# Altium PCB 100-678-02-00 CIB.PcbDoc
Units mil, origin at the board's own origin, x right, y up, seen from the top; angles counter-clockwise.
Board outline 4640 x 6850 mil, 2 copper layers (Top Layer, Bottom Layer), stack 92.4 mil thick; 41 components, 41 nets, 209 pads, 1 vias.
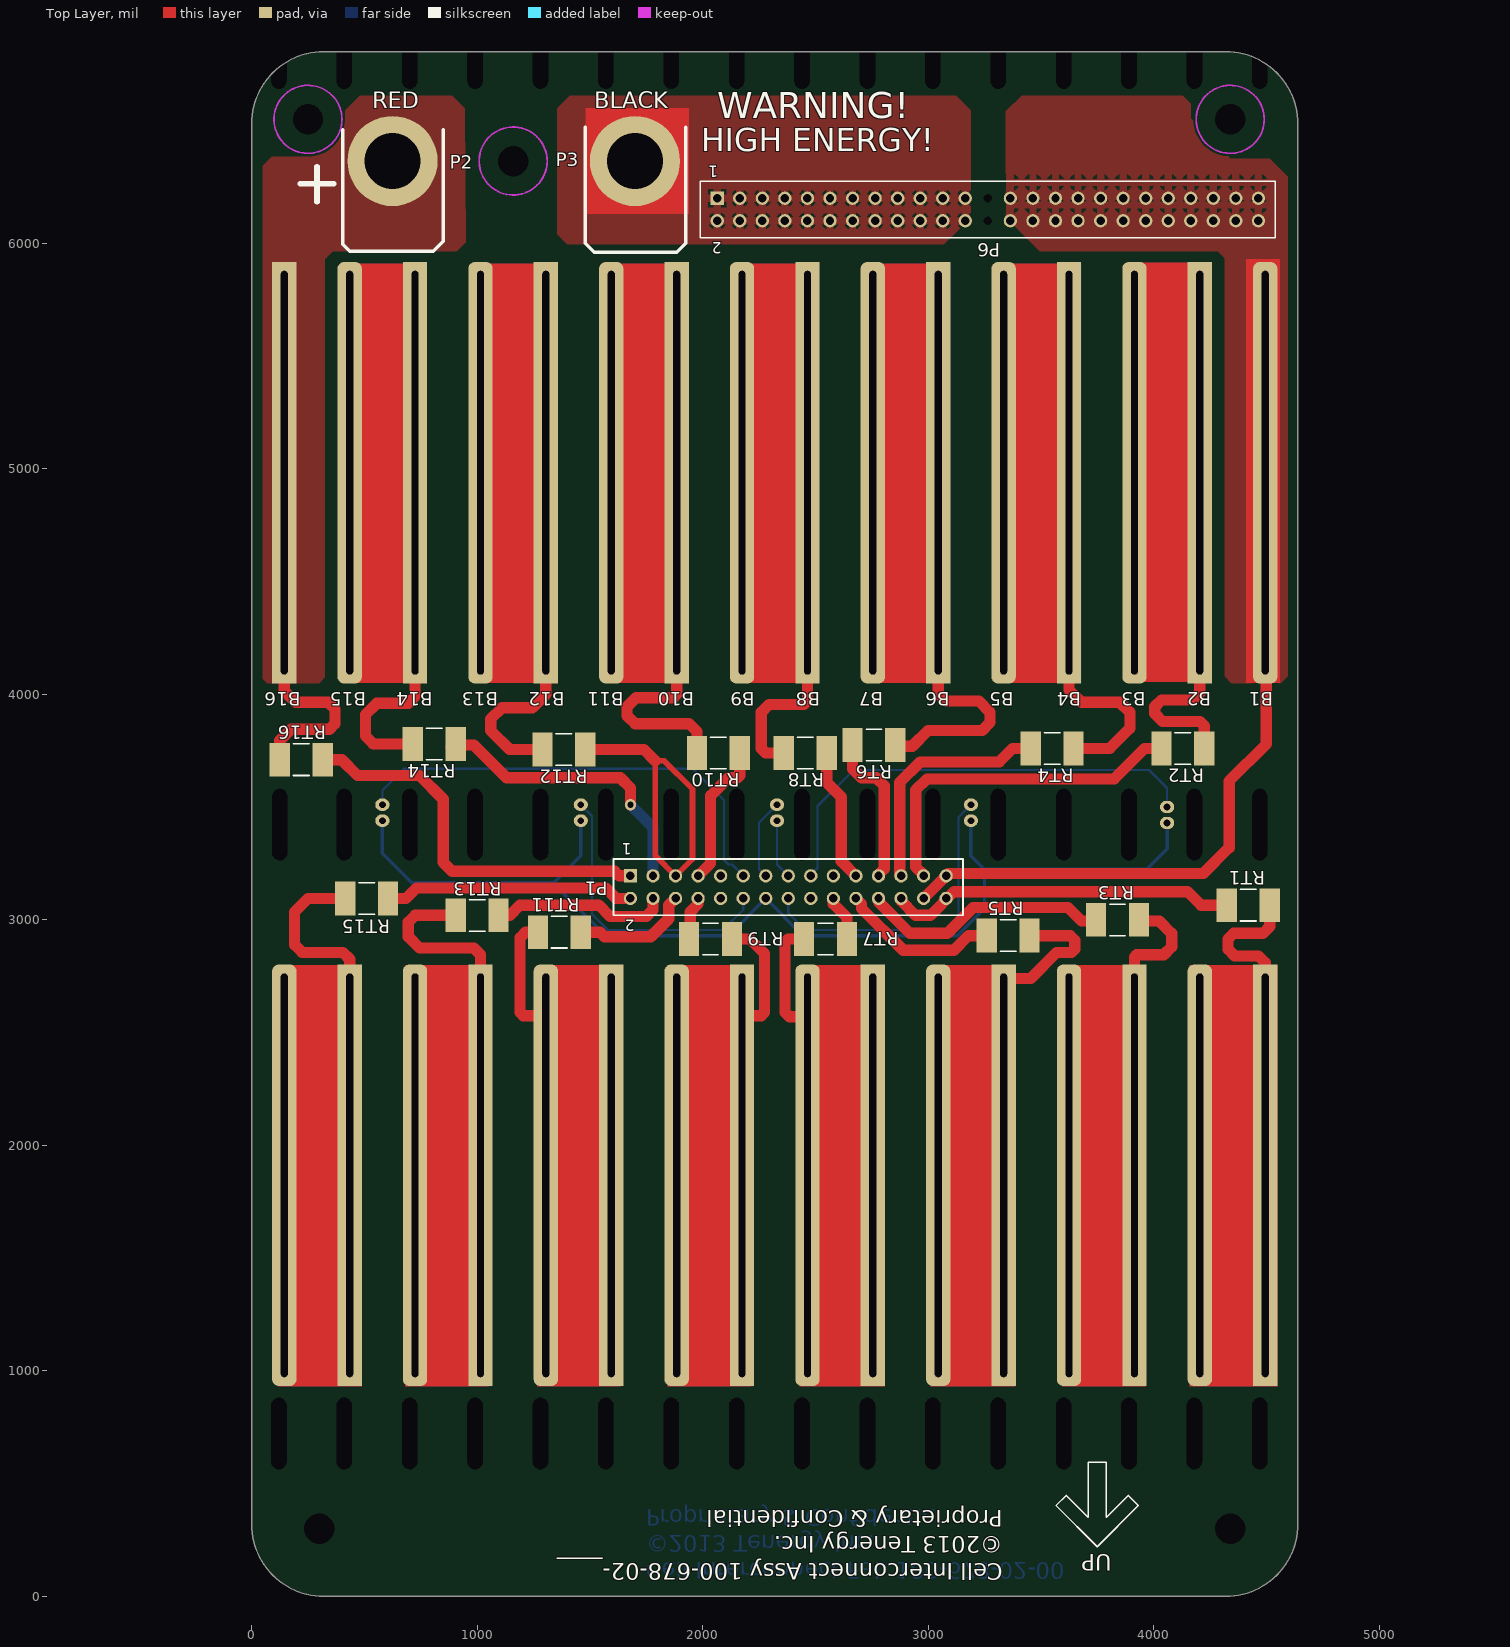
[diagram p0: Top Layer view]
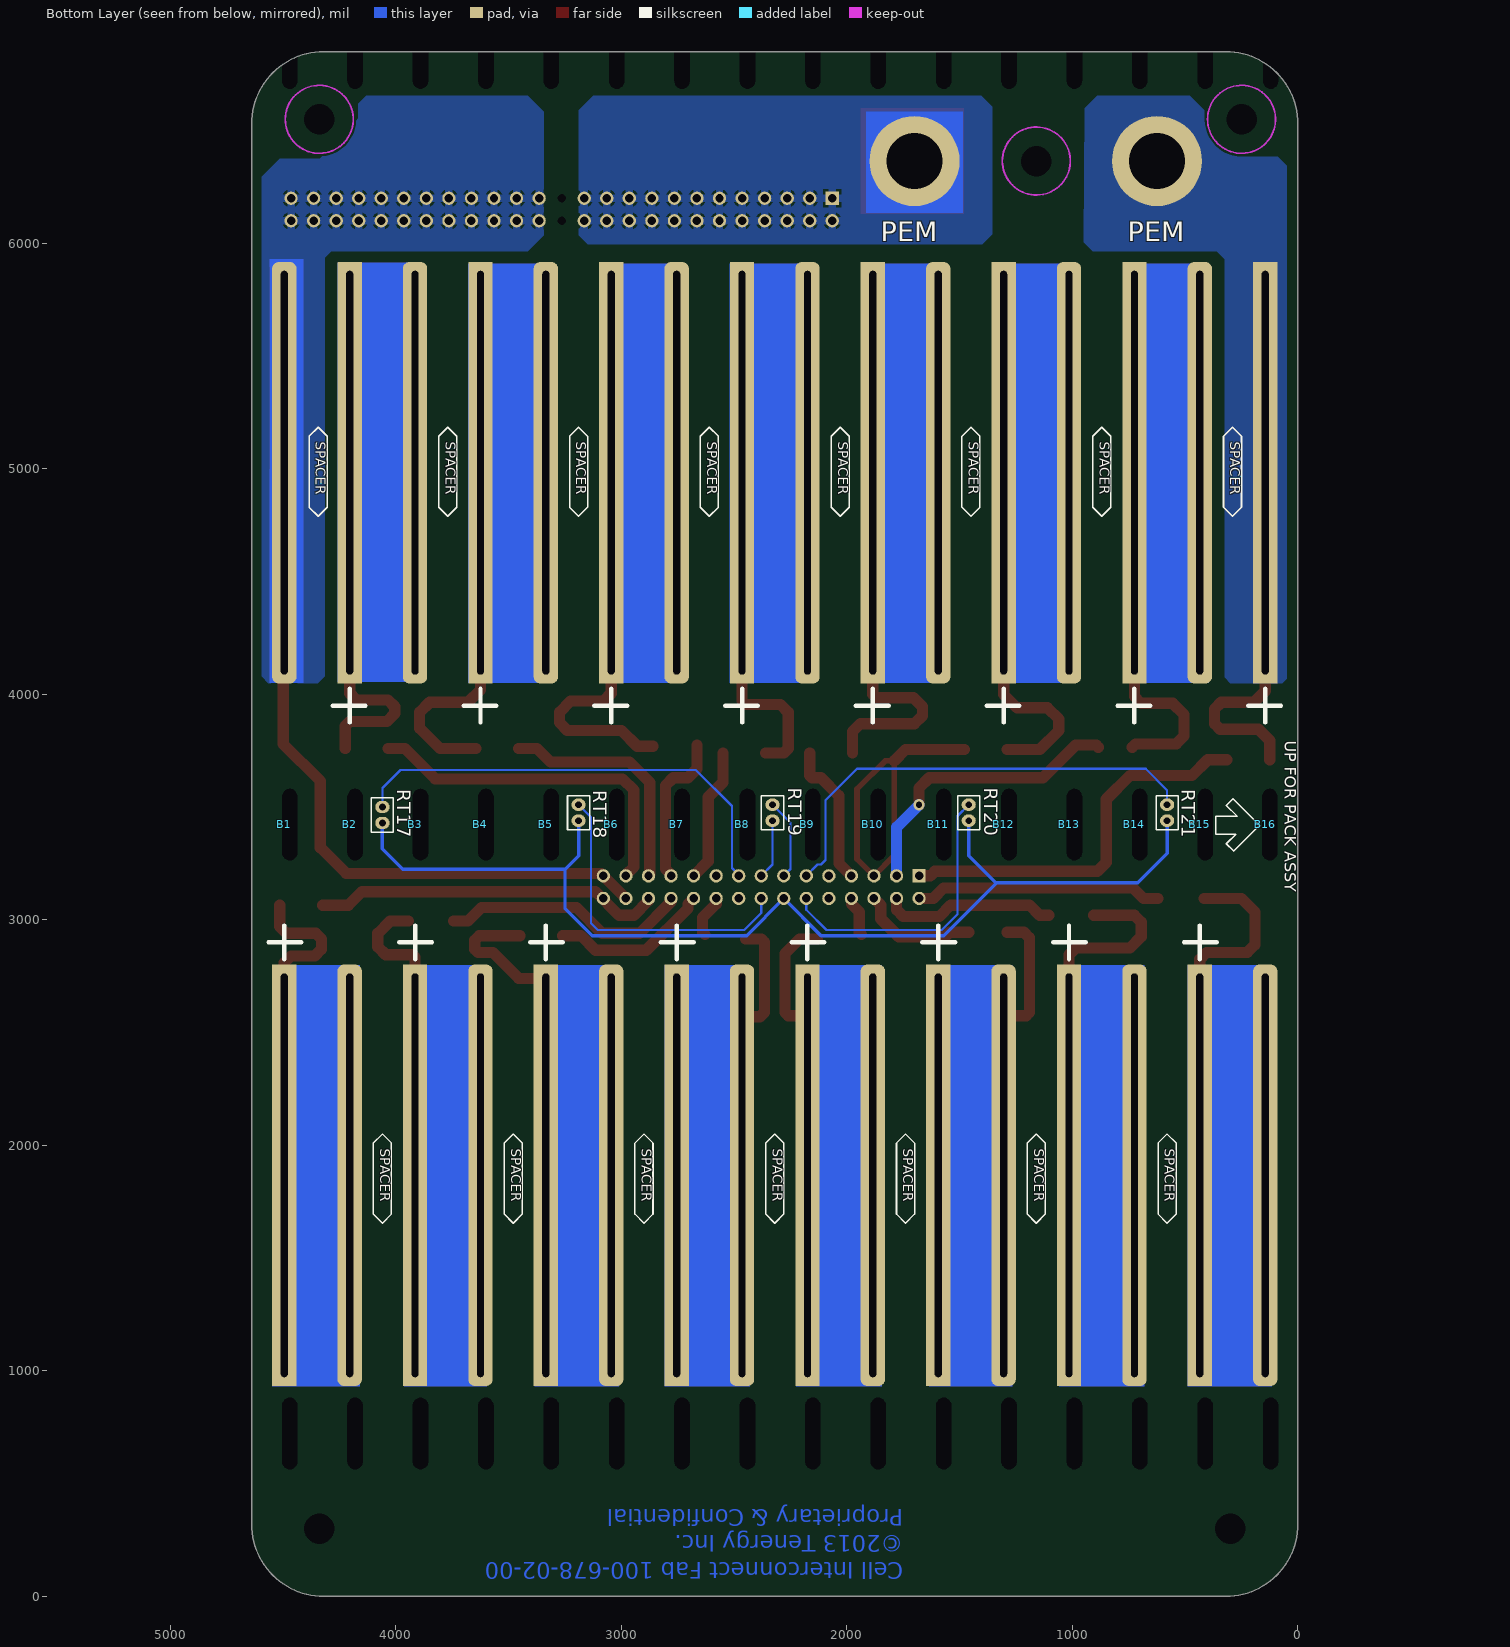
[diagram p1: Bottom Layer view, seen from below]

## Layer stack, top to bottom
Top Layer: signal copper 4.2
Dielectric: prepreg 84, FR-4, Dk 4.8
Bottom Layer: signal copper 4.2

## Board outline
0,320 ccw(c320,320) 320,0 4320,0 ccw(c4320,320) 4640,320 4640,6530 ccw(c4320,6530) 4320,6850 320,6850 ccw(c320,6530) 0,6530

## Design rules (kind name [scope] priority, off if disabled: settings)
Clearance [All] p1: gap=10
ComponentClearance [All] p1 off: gap=0 collisioncheckmode=3 verticalgap=10 showdistances=FALSE
Height [All] p1: minheight=0 maxheight=10236.22 prefheight=500
HoleSize [All] p1 off: absolutevalues=TRUE maxlimit=1730 minlimit=1 maxpercent=80.000 minpercent=20.000
PolygonConnect PolygonConnect_8 [All vs IsNamedPolygon('BATTP-TOP')] p1: connectstyle=Direct reliefconductorwidth=10 reliefentries=4 polygonreliefangle="90 Angle" airgapwidth=10
PolygonConnect PolygonConnect_7 [All vs IsNamedPolygon('BATTP-BOT')] p2: connectstyle=Direct reliefconductorwidth=10 reliefentries=4 polygonreliefangle="90 Angle" airgapwidth=10
PolygonConnect PolygonConnect_6 [All vs IsNamedPolygon('CELL01N-TOP')] p3: connectstyle=Relief reliefconductorwidth=35 reliefentries=4 polygonreliefangle="90 Angle" airgapwidth=10
PolygonConnect PolygonConnect_5 [All vs IsNamedPolygon('CELL01N-TOP')] p4: connectstyle=Relief reliefconductorwidth=40 reliefentries=4 polygonreliefangle="90 Angle" airgapwidth=10
PolygonConnect PolygonConnect_4 [All vs IsNamedPolygon('CELL01N-TOP')] p5: connectstyle=Relief reliefconductorwidth=10 reliefentries=4 polygonreliefangle="90 Angle" airgapwidth=10
PolygonConnect PolygonConnect_3 [All vs IsNamedPolygon('CELL01N-TOP')] p6: connectstyle=Direct reliefconductorwidth=10 reliefentries=4 polygonreliefangle="90 Angle" airgapwidth=10
PolygonConnect PolygonConnect_2 [All vs IsNamedPolygon('BATT_P-TOP')] p7: connectstyle=Direct reliefconductorwidth=10 reliefentries=4 polygonreliefangle="90 Angle" airgapwidth=10
PolygonConnect PolygonConnect_1 [All vs IsNamedPolygon('BATT_P-BOT')] p8: connectstyle=Direct reliefconductorwidth=10 reliefentries=4 polygonreliefangle="90 Angle" airgapwidth=10
PolygonConnect [All] p9: connectstyle=Relief reliefconductorwidth=35 reliefentries=4 polygonreliefangle="90 Angle" airgapwidth=10
RoomDefinition "100-678-02-00 CIB" [InComponentClass('100-678-02-00 CIB')] p1 off: confinementstyle=ConfineIn formatcopy=TRUE lockcomponents=FALSE outline -955,-930 1045,-930 1045,70 -955,70
RoutingVias [All] p1: holewidth=28 width=50 viastyle="Through Hole" minholewidth=28 minwidth=50 maxholewidth=50 maxwidth=75
SilkToSilkClearance [All] p1: silktosilkclearance=5
SilkToSolderMaskClearance SilkscreenOverComponentPads [IsPad] p1: minsilkscreentomaskgap=5 clearancetoexposedcopper=TRUE
SolderMaskExpansion [All] p1: expansion=4
Width [All] p1: maxlimit=250 minlimit=10 preferedwidth=10 minimp=50.000000 maximp=50.000000 favimp=50.000000
23 further rules are at their usual default settings.

## Components (designator, comment, footprint, x,y, rotation, side; value= is the part's Value field where it differs from the comment)
B1 "TENERGY 30209 LiFePO4 Cell" "TENERGY 30209 LiFePO4 Cell - 30MIL SLOT" 4495,3425 r270 bottom locked
B2 "TENERGY 30209 LiFePO4 Cell" "TENERGY 30209 LiFePO4 Cell - 30MIL SLOT" 4205,3425 r90 bottom locked
B3 "TENERGY 30209 LiFePO4 Cell" "TENERGY 30209 LiFePO4 Cell - 30MIL SLOT" 3915,3425 r270 bottom locked
B4 "TENERGY 30209 LiFePO4 Cell" "TENERGY 30209 LiFePO4 Cell - 30MIL SLOT" 3625,3425 r90 bottom locked
B5 "TENERGY 30209 LiFePO4 Cell" "TENERGY 30209 LiFePO4 Cell - 30MIL SLOT" 3335,3425 r270 bottom locked
B6 "TENERGY 30209 LiFePO4 Cell" "TENERGY 30209 LiFePO4 Cell - 30MIL SLOT" 3045,3425 r90 bottom locked
B7 "TENERGY 30209 LiFePO4 Cell" "TENERGY 30209 LiFePO4 Cell - 30MIL SLOT" 2755,3425 r270 bottom locked
B8 "TENERGY 30209 LiFePO4 Cell" "TENERGY 30209 LiFePO4 Cell - 30MIL SLOT" 2465,3425 r90 bottom locked
B9 "TENERGY 30209 LiFePO4 Cell" "TENERGY 30209 LiFePO4 Cell - 30MIL SLOT" 2175,3425 r270 bottom locked
B10 "TENERGY 30209 LiFePO4 Cell" "TENERGY 30209 LiFePO4 Cell - 30MIL SLOT" 1885,3425 r90 bottom locked
B11 "TENERGY 30209 LiFePO4 Cell" "TENERGY 30209 LiFePO4 Cell - 30MIL SLOT" 1595,3425 r270 bottom locked
B12 "TENERGY 30209 LiFePO4 Cell" "TENERGY 30209 LiFePO4 Cell - 30MIL SLOT" 1305,3425 r90 bottom locked
B13 "TENERGY 30209 LiFePO4 Cell" "TENERGY 30209 LiFePO4 Cell - 30MIL SLOT" 1015,3425 r270 bottom locked
B14 "TENERGY 30209 LiFePO4 Cell" "TENERGY 30209 LiFePO4 Cell - 30MIL SLOT" 725,3425 r90 bottom locked
B15 "TENERGY 30209 LiFePO4 Cell" "TENERGY 30209 LiFePO4 Cell - 30MIL SLOT" 435,3425 r270 bottom locked (schematic designator B16)
B16 "TENERGY 30209 LiFePO4 Cell" "TENERGY 30209 LiFePO4 Cell - 30MIL SLOT" 145,3425 r90 bottom locked
P1 "Header 15X2" "CONN 2X15 SKT TH" 1680,3195 r0 top locked
P2 "CONN TAB MALE 1/4\" PC TH" "TERM, LUG, RING TONGUE, #8-32 W/ PEM" 625,6365 r0 top locked
P3 "CONN TAB MALE 1/4\" PC TH" "TERM, LUG, RING TONGUE, #8-32 W/ PEM" 1700,6365 r0 top locked (schematic designator P2)
P6 "Header 25X2" "CONN 2X25 SKT TH" 2065,6200 r0 top
RT1 "PTC" "THERM 1812" 4420,3065 r180 top
RT2 "PTC" "THERM 1812" 4130,3760 r180 top
RT3 "PTC" "THERM 1812" 3840,3000 r180 top
RT4 "PTC" "THERM 1812" 3550,3760 r180 top
RT5 "PTC" "THERM 1812" 3355,2930 r180 top
RT6 "PTC" "THERM 1812" 2760,3775 r180 top
RT7 "PTC" "THERM 1812" 2545,2915 r0 top
RT8 "PTC" "THERM 1812" 2455,3740 r0 top
RT9 "PTC" "THERM 1812" 2035,2915 r0 top
RT10 "PTC" "THERM 1812" 2070,3740 r180 top
RT11 "PTC" "THERM 1812" 1365,2945 r180 top
RT12 "PTC" "THERM 1812" 1385,3755 r180 top
RT13 "PTC" "THERM 1812" 1000,3020 r180 top
RT14 "PTC" "THERM 1812" 810,3780 r180 top
RT15 "PTC" "THERM 1812" 510,3095 r180 top
RT16 "PTC" "THERM 1812" 220,3710 r180 top
RT17 "10K" "THERMISTOR JT" 4060,3465 r270 bottom
RT18 "10K" "THERMISTOR JT" 3190,3475 r270 bottom
RT19 "10K" "THERMISTOR JT" 2330,3475 r270 bottom
RT20 "10K" "THERMISTOR JT" 1460,3475 r270 bottom
RT21 "10K" "THERMISTOR JT" 580,3475 r270 bottom

## Footprints (in the part's own frame and the unit in brackets; to place one, negate y for a bottom-side part, rotate by r counter-clockwise, add the part's x,y. Pads: shape width x height; smd on the part's side, far side on the other; paste and mask are expansions set on the pad)
"CONN 2X15 SKT TH" [mm]
  rect 1.5x1.5 hole 0.953: 1(0,0)
  round 1.5 hole 0.953: 2(0,-2.54) 3(2.54,0) 4(2.54,-2.54) 5(5.08,0) 6(5.08,-2.54) 7(7.62,0) 8(7.62,-2.54) 9(10.16,0) 10(10.16,-2.54) 11(12.7,0) 12(12.7,-2.54) 13(15.24,0) 14(15.24,-2.54) 15(17.78,0) 16(17.78,-2.54) 17(20.32,0) 18(20.32,-2.54) 19(22.86,0) 20(22.86,-2.54) 21(25.4,0) 22(25.4,-2.54) 23(27.94,0) 24(27.94,-2.54) 25(30.48,0) 26(30.48,-2.54) 27(33.02,0) 28(33.02,-2.54) 29(35.56,0) 30(35.56,-2.54)
  silkscreen extent -1.91,-4.44 37.46,1.91, body extent -1.27,-3.81 36.83,1.27, height 6.38
"CONN 2X25 SKT TH" [mm]
  rect 1.5x1.5 hole 0.953: 1(0,0)
  round 1.5 hole 0.953: 2(0,-2.54) 3(2.54,0) 4(2.54,-2.54) 5(5.08,0) 6(5.08,-2.54) 7(7.62,0) 8(7.62,-2.54) 9(10.16,0) 10(10.16,-2.54) 11(12.7,0) 12(12.7,-2.54) 13(15.24,0) 14(15.24,-2.54) 15(17.78,0) 16(17.78,-2.54) 17(20.32,0) 18(20.32,-2.54) 19(22.86,0) 20(22.86,-2.54) 21(25.4,0) 22(25.4,-2.54) 23(27.94,0) 24(27.94,-2.54) 27(33.02,0) 28(33.02,-2.54) 29(35.56,0) 30(35.56,-2.54) 31(38.1,0) 32(38.1,-2.54) 33(40.64,0) 34(40.64,-2.54) 35(43.18,0) 36(43.18,-2.54) 37(45.72,0) 38(45.72,-2.54) 39(48.26,0) 40(48.26,-2.54) 41(50.8,0) 42(50.8,-2.54) 43(53.34,0) 44(53.34,-2.54) 45(55.88,0) 46(55.88,-2.54) 47(58.42,0) 48(58.42,-2.54) 49(60.96,0) 50(60.96,-2.54)
  round 0 hole 0.953 unplated mask+0: 25(30.48,0) 26(30.48,-2.54)
  silkscreen extent -1.91,-4.44 62.86,1.91, body extent -1.27,-3.81 62.23,1.78, height 6.38
"TENERGY 30209 LiFePO4 Cell - 30MIL SLOT" [mil]
  rect 1868.11x107.8 hole 30 slot 1789.37 at 0 deg: 1(1557.83,0)
  rrect50% 1868.11x107.8 hole 30 slot 1789.37 at 0 deg: 2(-1557.83,0)
  silkscreen extent 450,-70 600,75, body extent -3425,-145 3425,145, height 9764
"TERM, LUG, RING TONGUE, #8-32 W/ PEM" [mil]
  round 400 hole 250: 1(0,0)
  body extent -171,-172 172,172
"THERM 1812" [mil]
  rect 90x150 smd: 1(-95,0) 2(95,0)
  silkscreen extent -35,-70 35,70, body extent -110,-65 110,65, height 50
"THERMISTOR JT" [mil]
  oval 55x63 hole 30: 1(-35.43,0) 2(35.43,0)
  silkscreen extent -76,-49 76,49, body extent -72,-10 72,10, height 3740

## Part data
P1: "CONN, SKT, 2X15P, 0.1\" CTRS, TH, 0.435\" HEIGHT GOLD"
P2 P3: "TERM, LUG, RING TONGUE, W/8-32 PEM"
P6: "CONN, SKT, 2X25P, 0.1\" CTRS, TH, 0.435\" HEIGHT GOLD"
RT1 RT2 RT3 RT4 RT5 RT6 RT7 RT8 RT9 RT10 RT11 RT12 RT13 RT14 RT15 RT16: library part "Res Thermal", "PTC 2.00A 8VDC RESETTABLE 1812L"
RT17 RT18 RT19 RT20 RT21: library part "Res Thermal", "THERMISTOR NTC 10K B3435 TF 100MM"

## Free pads (board coordinates)
  round 0 hole 67.5 slot 317.5 at 90 deg unplated: 0(121,722) 0(125,3422) 0(411,722) 0(411,3422) 0(701,722) 0(701,3422) 0(991,722) 0(991,3422) 0(1281,722) 0(1281,3422) 0(1571,722) 0(1571,3422) 0(1861,722) 0(1861,3422) 0(2151,722) 0(2151,3422) 0(2441,722) 0(2441,3422) 0(2731,722) 0(2731,3422) 0(3021,722) 0(3021,3422) 0(3311,722) 0(3311,3422) 0(3601,722) 0(3601,3422) 0(3891,722) 0(3891,3422) 0(4181,722) 0(4181,3422) 0(4471,722) 0(4471,3422)
  round 0 hole 67.5 slot 200 at 90 deg unplated: 0(121,6785) 0(411,6785) 0(701,6785) 0(991,6785) 0(1281,6785) 0(1571,6785) 0(1861,6785) 0(2151,6785) 0(2441,6785) 0(2731,6785) 0(3021,6785) 0(3311,6785) 0(3601,6785) 0(3891,6785) 0(4181,6785) 0(4471,6785)
  round 0 hole 135 unplated: 0(250,6550) 0(300,300) 0(1160,6365) 0(4340,300) 0(4340,6550)

## Via types
v1: diameter 50, hole 28, Top Layer to Bottom Layer, 1 vias

## Nets (pads, with @x,y where several pads share a name; then routed paths per layer and width w, separated by ;. In a path a pad name is that pad's centre, name@x,y a point inside that pad or via, vN(x,y) a via of type N, cw(c..) or ccw(c..) an arc to the next point about the centre after c; other vN are vias at no path point)
BATT_N: P3.1 P6.1 P6.2 P6.3 P6.4 P6.5 P6.6 P6.7 P6.8 P6.9 P6.10 P6.11 P6.12 P6.13 P6.14 P6.15 P6.16 P6.17 P6.18 P6.19 P6.20 P6.21 P6.22 P6.23 P6.24
BATT_P: B16.1 P2.1 RT16.2 | length 1669.2
  Top Layer w50: RT16.2 125,3795 175,3845 345,3845 370,3870 370,3935 340,3965 195,3965 145,4015 B16.1@145,5000
CELL01MON: P1.26 P1.30 RT1.2 | length 1550.3
  Top Layer w50: P1.26 2880,3085 2945,3020 3010,3020 3115,3125 4150,3125 4210,3065 RT1.2
CELL01N: B1.2 P1.28 P1.29 P6.27 P6.28 P6.29 P6.30 P6.31 P6.32 P6.33 P6.34 P6.35 P6.36 P6.37 P6.38 P6.39 P6.40 P6.41 P6.42 P6.43 P6.44 P6.45 P6.46 P6.47 P6.48 P6.49 P6.50 | length 3191.5
  Top Layer w50: P1.28 3090,3205 4220,3205 4335,3320 4335,3615 4500,3780 B1.2@4500,4995
CELL01P: B1.1 B2.2 RT1.1 | length 1502.4
  Top Layer w50: B1.1@4494.8,1845.2 4494.8,2810.2 4465,2840 4360,2840 4330,2870 4330,2915 4355,2940 4485,2940 4515,2970 RT1.1
CELL02MON: P1.27 RT2.2 | length 1561.1
  Top Layer w50: P1.27 2980,3200 2945,3235 2945,3575 2995,3625 3825,3625 3960,3760 RT2.2
CELL02P: B2.1 B3.2 RT2.1 | length 1592.6
  Top Layer w50: B2.1@4205,5000 4205,4005 4175,3975 4035,3975 4005,3945 4005,3915 4040,3880 4205,3880 4225,3860 RT2.1
CELL03MON: P1.24 RT3.2 | length 1110.5
  Top Layer w50: P1.24 2780,3080 2920,2940 3085,2940 3200,3055 3620,3055 3680,2995 RT3.2@3745,2995
CELL03P: B3.1 B4.2 RT3.1 | length 1371.8
  Top Layer w50: B3.1@3915,1864.67 3915,2835 3925,2845 4045,2845 4080,2880 4080,2940 4025,2995 RT3.1@3945,2995
CELL04MON: P1.25 RT4.2 | length 1060
  Top Layer w50: P1.25 2874,3201 2874,3609 2965,3700 3315,3700 3375,3760 RT4.2
CELL04P: B4.1 B5.2 RT4.1 | length 1648.7
  Top Layer w50: B4.1@3625,5000 3625,4020 3680,3965 3850,3965 3895,3920 3895,3850 3805,3760 RT4.1
CELL05MON: P1.22 RT5.2 | length 713.9
  Top Layer w50: P1.22 2705,3070 2705,3050 2890,2865 3115,2865 3180,2930 RT5.2
CELL05P: B5.1 B6.2 RT5.1 | length 1554.2
  Top Layer w50: B5.1@3335,1845 B5.1@3335,2740 ; B5.1@3335,2775 B5.1@3335,2740 ; B5.1@3340,2735 B5.1@3335,2740 ; RT5.1 3630,2930 3650,2910 3650,2870 3635,2855 3570,2855 3455,2740 B5.1@3335,2740
CELL06MON: P1.23 RT6.2 | length 686.4
  Top Layer w50: RT6.2 2665,3670 2705,3630 2770,3630 2805,3595 2805,3225 2780,3200 P1.23
CELL06P: B6.1 B7.2 RT6.1 | length 1746.7
  Top Layer w50: RT6.1@2859.8,3770 2930,3770 3000,3840 3240,3840 3275,3875 3275,3920 3225,3970 3080,3970 3045,4005 B6.1
CELL07MON: P1.20 RT7.2 | length 189.1
  Top Layer w50: P1.20 2580,3070 2640,3010 2640,2945.2 RT7.2@2629.8,2935
CELL07P: B7.1 B8.2 RT7.1 | length 1429.5
  Top Layer w50: RT7.1 2380,2915 2365,2900 2365,2590 2385,2570 B8.2@2465,2570 ; B8.2@2465,1845 B8.2@2465,2570 ; B8.2@2465,2765 B8.2@2465,2570
CELL08MON: P1.21 RT8.2 | length 598.8
  Top Layer w50: RT8.2 2550,3610 2614.8,3545.2 2614.8,3260.2 P1.21
CELL08P: B8.1 B9.2 RT8.1 | length 1506.8
  Top Layer w50: RT8.1 2280,3740 2260,3760 2260,3920 2295,3955 2450,3955 2465,3970 B8.1
CELL09MON: P1.8 RT9.1 | length 178.6
  Top Layer w50: RT9.1@1935.2,2935 1945,2944.8 1945,3035 1980,3070 P1.8
CELL09P: B9.1 B10.2 RT9.2 | length 538.1
  Top Layer w50: RT9.2 2210,2915 2275,2850 2275,2590 2260,2575 B9.1@2175,2575
CELL10MON: P1.7 RT10.1 | length 645.1
  Top Layer w50: P1.7 2034.8,3249.8 2034.8,3549.8 2115,3630 2155,3630 2165,3640 RT10.1
CELL10P: B10.1 B11.2 RT10.2 | length 2006.8
  Top Layer w50: B11.2@1595,5000 1885,5000 B10.1 1885,4000 1870,3985 1705,3985 1665,3945 1665,3905 1700,3870 1940,3870 1975,3835 RT10.2
CELL11MON: P1.6 RT11.1 | length 533.8
  Top Layer w50: RT11.1 1545,2945 1565,2925 1770,2925 1850,3005 1850,3065 P1.6
CELL11P: B11.1 B12.2 RT11.2 | length 566.8
  Top Layer w50: RT11.2@1290.2,2945 1215,2945 1190,2920 1190,2590 1205,2575 B12.2@1310,2575
CELL12MON: P1.5 RT12.1 | length 1510.8
  Top Layer w25: 1790,3285 P1.5 1955,3270 1955,3580 1830,3705 1790,3705 1790,3285
  Top Layer w50: RT12.1 1740,3755 1790,3705
CELL12P: B12.1 B13.2 RT12.2 | length 1588.6
  Top Layer w50: RT12.2 1145,3755 1060,3840 1060,3890 1110,3940 1245,3940 1305,4000 B12.1
CELL13MON: P1.4 RT13.1 | length 776.8
  Top Layer w50: RT13.1@1105,3020 1145,3020 1190,3065 1540,3065 1590,3015 1750,3015 1780,3045 P1.4
CELL13P: B13.1 B14.2 RT13.2 | length 1618.4
  Top Layer w50: RT13.2 725,3020 695,2990 695,2925 745,2875 985,2875 1015,2845 B13.1
CELL14MON: P1.3 RT14.1 | length 1309.5
  Top Layer w50: RT14.1@884.8,3765 894.8,3775 985,3775 1130,3630 1635,3630 1680,3585 v1(1680,3510)
  Bottom Layer w50: v1(1680,3510) 1780,3410 P1.3
CELL14P: B14.1 B15.2 RT14.2 | length 1609
  Top Layer w50: B14.1@725,5000 725,3990 695,3960 555,3960 505,3910 505,3815 540,3780 720.2,3780 RT14.2@735.2,3765
CELL15P: B15.1 B16.2 RT15.2 | length 1646.8
  Top Layer w50: RT15.2 250,3095 190,3035 190,2890 225,2855 405,2855 435,2825 B15.1@435,1845
CELL16MON: P1.1 RT16.1 | length 1742.3
  Top Layer w50: RT16.1 400,3710 470,3640 745,3640 850,3535 850,3255 890,3215 1610,3215 1630,3195 P1.1
NetP1_2: P1.2 RT15.1 | length 1098.1
  Top Layer w50: RT15.1@620,3095 685,3095 731,3141 1571,3141 1617,3095 P1.2
THERM_1: P1.17 RT17.1 | length 2066.8
  Bottom Layer w10: P1.17 2480,3200 2510,3230 2510,3505 2670,3665 3980,3665 4060,3585 RT17.1@4060,3490
THERM_2: P1.16 RT18.1 | length 1411.7
  Bottom Layer w10: P1.16 2380,3030 2455,2955 3105,2955 3135,2985 3135,3455.43 RT18.1
THERM_3: P1.12 RT20.1 | length 1292.4
  Bottom Layer w10: RT20.1 1510,3460.43 1510,3025 1580,2955 2090,2955 2180,3045 P1.12
THERM_4: P1.11 RT21.1 | length 2066.3
  Bottom Layer w10: RT21.1@580,3500 580,3575 675,3670 1955,3670 2095,3530 2095,3265 2115,3245 2130,3245 P1.11
THERM_GG: P1.13 RT19.1 | length 361
  Bottom Layer w10: P1.13 2250,3225 2250,3430.43 RT19.1
THERM_RTN: P1.14 RT17.2 RT18.2 RT20.2 RT21.2 | length 4896.9
  Bottom Layer w15: RT21.2@580,3450 580,3295 710,3165 1337.5,3165 ; RT20.2@1460,3450 1460,3285 1337.5,3162.5 1570,2930 2115,2930 P1.14 2445,2930 3130,2930 3250,3050 3250,3225 ; RT18.2@3190,3450 RT18.2 3190,3285 3250,3225 ; RT17.2@4060,3440 4060,3315 3970,3225 3250,3225
VREF_GG: P1.15 RT19.2 | length 265.3
  Bottom Layer w10: RT19.2 2330,3245 P1.15
pads on no net: P1.9 P1.10 P1.18 P1.19 P6.25 P6.26

## Polygon pours and split planes (outlines as drawn)
CELL01N on Top Layer "CELL01N-TOP" (solid, remove dead copper, pour order 8): 3345,6115 3495,5965 4285,5965 4315,5935 4315,4080 4345,4050 4565,4050 4595,4080 4595,6295 4515,6375 4340.98,6375 4165,6554.8 4165,6620 4130,6655 3415,6655 3345,6585
BATT_N on Top Layer "BATTN-TOP" (solid, remove dead copper, pour order 10): 1355,6600 1410,6655 3125,6655 3190,6590 3190,6115 3070,5995 1400,5995 1355,6040
BATT_P on Top Layer "BATTP-TOP" (solid, remove dead copper, pour order 12): 945,6600 890,6655 480,6655 415,6590 415,6550 250,6415 250,6385 90,6385 50,6345 50,4070 70,4050 300,4050 325,4075 325,5930 360,5965 910,5965 950,6005
CELL01N on Bottom Layer "CELL01N-BOT" (solid, remove dead copper, pour order 7): 3345,6035 3414.73,5965.27 4285.78,5965.27 4315.78,5935.27 4315.78,4080.27 4345.78,4050.27 4565.78,4050.27 4595.78,4080.27 4595.78,6295.27 4516.06,6375 4338,6375 4166,6553.81 4166,6620.06 4130.78,6655.27 3415.78,6655.27 3345,6584.49
BATT_N on Bottom Layer "BATTN-BOT" (solid, remove dead copper, pour order 9): 1355,6605 1405,6655 3125,6655 3190,6590 3190,6035 3150,5995 1400,5995 1355,6040
BATT_P on Bottom Layer "BATTP-BOT" (solid, remove dead copper, pour order 11): 945,6600 890,6655 480,6655 415,6590 415,6550 250,6415 250,6385 90,6385 50,6345 50,4070 70,4050 300,4050 325,4075 325,5930 360,5965 910,5965 950,6005

## Keep-outs
Keep-Out Layer:
  circle w7.87: c1160,6365 r150.75
  circle w7.87: c4340,6550 r150.75
  circle w7.87: c250,6550 r150.75

## Other copper
Top Layer:
  rectangle net BATT_N: 1480,6130 1940,6600
  rectangle net CELL14P: 405,4050 760,5910
  rectangle net CELL12P: 985,4050 1345,5910
  rectangle net CELL10P: 1570,4050 1925,5910
  rectangle net CELL08P: 2140,4050 2510,5910
  rectangle net CELL06P: 2720,4050 3085,5910
  rectangle net CELL04P: 3305,4050 3675,5910
  rectangle net CELL02P: 3890,4055 4255,5915
  rectangle net CELL01P: 4160,930 4550,2800
  rectangle net CELL03P: 3595,930 3965,2800
  rectangle net CELL05P: 3010,930 3385,2800
  rectangle net CELL07P: 2430,930 2810,2800
  rectangle net CELL09P: 1845,930 2215,2800
  rectangle net CELL11P: 1265,930 1635,2800
  rectangle net CELL13P: 680,930 1050,2800
  rectangle net CELL15P: 120,930 490,2800
  rectangle net CELL01N: 4410,4050 4560,5930
Bottom Layer:
  rectangle net BATT_N: 1485,6135 1915,6585
  rectangle net CELL15P: 115,930 490,2800
  rectangle net CELL14P: 395,4050 770,5910
  rectangle net CELL12P: 985,4050 1355,5910
  rectangle net CELL10P: 1565,4050 1935,5910
  rectangle net CELL08P: 2150,4050 2520,5910
  rectangle net CELL06P: 2730,4050 3100,5910
  rectangle net CELL04P: 3310,4050 3680,5910
  rectangle net CELL02P: 3885,4055 4260,5915
  rectangle net CELL01P: 4160,930 4550,2800
  rectangle net CELL03P: 3595,930 3965,2800
  rectangle net CELL05P: 3010,930 3385,2800
  rectangle net CELL07P: 2430,930 2810,2800
  rectangle net CELL09P: 1845,930 2225,2800
  rectangle net CELL11P: 1265,930 1635,2800
  rectangle net CELL13P: 680,930 1060,2800
  rectangle net CELL01N: 4410,4050 4560,5930
  text "Proprietary & Confidential" at 1750,410 h125 r180
  text "©2013 Tenergy Inc." at 1750,295 h125 r180
  text "Cell Interconnect Fab 100-678-02-00" at 1750,175 h125 r180

## Silkscreen, mask and mechanical layers (free items; w line width, h text height)
Top Overlay:
  lines w7: 3567.5,402.5 3612.5,447.5 3710,350 3710,595 3735,595 3790,595 3790,350 3887.5,447.5 3932.5,402.5 3750,220 3567.5,402.5
  lines w15: 405,6505 405,5995 435,5965 805,5965 850,6010 850,6505 ; 1480,6515 1480,6000 1520,5960 1885,5960 1925,6000 1925,6515
  lines w25: 215,6265 365,6265 ; 290,6185 290,6340
  text "RED" at 535,6575 h125
  text "BLACK" at 1520,6575 h125
  text "WARNING!" at 2065,6515 h200
  text "HIGH ENERGY!" at 1995,6375 h175
  text "Proprietary & Confidential" at 3330,405 h125 r180
  text "©2013 Tenergy Inc." at 3330,290 h125 r180
  text "UP" at 3815,210 h125 r180
  text "Cell Interconnect Assy 100-678-02-____" at 3330,170 h125 r180
Bottom Overlay:
  lines w7: 170,3420 287.5,3537.5 317.5,3507.5 270,3460 365,3460 365,3380 275,3380 317.5,3337.5 285,3305 170,3420 ; 250,4830 250,5145 290,5185 330,5145 330,4830 290,4790 250,4830 ; 540,1695 540,2010 580,2050 620,2010 620,1695 580,1655 540,1695 ; 830,4830 830,5145 870,5185 910,5145 910,4830 870,4790 830,4830 ; 1120,1695 1120,2010 1160,2050 1200,2010 1200,1695 1160,1655 1120,1695 ; 1410,4830 1410,5145 1450,5185 1490,5145 1490,4830 1450,4790 1410,4830 ; 1700,1695 1700,2010 1740,2050 1780,2010 1780,1695 1740,1655 1700,1695 ; 1990,4830 1990,5145 2030,5185 2070,5145 2070,4830 2030,4790 1990,4830 ; 2280,1695 2280,2010 2320,2050 2360,2010 2360,1695 2320,1655 2280,1695 ; 2570,4830 2570,5145 2610,5185 2650,5145 2650,4830 2610,4790 2570,4830 ; 2860,1695 2860,2010 2900,2050 2940,2010 2940,1695 2900,1655 2860,1695 ; 3150,4830 3150,5145 3190,5185 3230,5145 3230,4830 3190,4790 3150,4830 ; 3440,1695 3440,2010 3480,2050 3520,2010 3520,1695 3480,1655 3440,1695 ; 3730,4830 3730,5145 3770,5185 3810,5145 3810,4830 3770,4790 3730,4830 ; 4020,1695 4020,2010 4060,2050 4100,2010 4100,1695 4060,1655 4020,1695 ; 4305,4830 4305,5145 4345,5185 4385,5145 4385,4830 4345,4790 4305,4830
  text "PEM" at 755,5980 h150
  text "PEM" at 1850,5980 h150
  text "SPACER" at 315,5120 h75 r90
  text "SPACER" at 895,5120 h75 r90
  text "SPACER" at 1475,5120 h75 r90
  text "SPACER" at 2055,5120 h75 r90
  text "SPACER" at 2635,5120 h75 r90
  text "SPACER" at 3215,5120 h75 r90
  text "SPACER" at 3795,5120 h75 r90
  text "SPACER" at 4370,5120 h75 r90
  text "UP FOR PACK ASSY" at 75,3795 h90 r90
  text "SPACER" at 605,1985 h75 r90
  text "SPACER" at 1185,1985 h75 r90
  text "SPACER" at 1765,1985 h75 r90
  text "SPACER" at 2345,1985 h75 r90
  text "SPACER" at 2925,1985 h75 r90
  text "SPACER" at 3505,1985 h75 r90
  text "SPACER" at 4085,1985 h75 r90
Top Solder:
  region: 1500,6380 1500,6080 1570,6010 1825,6010 1900,6085 1900,6380
  region: 425,6365 425,6060 505,5980 740,5980 825,6065 825,6365
Mechanical 1:
  lines w7.01: -720,-455 -720,10045 14080,10045 14080,-455 -720,-455
Mechanical 2:
  text "100-678-02-00 Cell Interconnect Board Assembly Drawing" at 210,8960 h200
  text "©2013 Tenergy, Inc." at 195,8770 h200
  text "Proprietary & Confidential" at 205,8580 h200
  text "ASSEMBLY NOTES:" at 6590,6572 h60
Mechanical 3:
  the board outline again, w7.87
Drill Drawing:
  circle w7.87: c250,6550 r135
  circle w7.87: c1160,6365 r135
  circle w7.87: c4340,6550 r135
  circle w7.87: c300,300 r135
  circle w7.87: c4340,300 r135
  lines w12: 6810,1877 9455,1877 ; 6810,2102.2 9455,2102.2 ; 6750,978 ccw(c6823,978) 6823,905 9442,905 ccw(c9442,978) 9515,978 9515,2442 ccw(c9442,2442) 9442,2515 6823,2515 ccw(c6823,2442) 6750,2442 6750,978
  text "100-678-02-00 Cell Interconnect Board Fabrication Drawing" at 210,8960 h200
  text "©2013 Tenergy, Inc." at 195,8770 h200
  text "Proprietary & Confidential" at 205,8580 h200
  text ".Legend" at 6620,6865 h60
  text "FAB NOTES:" at 6590,6567 h60
  text "1. Materials: Green clad,  FR-4/Epoxy class or equivalent," at 6685,6387 h60
  text "dielectric constant 4.2 +/-0.4, ee board cross-section for thickness," at 6840,6239.6 h60
  text "for copper weight and layer structures" at 6845,6092.2 h60
  text "2. All dimesions are in inches." at 6685,5950 h60
  text "3. Omitted" at 6680,5795 h60
  text "4. Drilling/Routing:" at 6685,5650 h60
  text "4.1 Minimum hole size is 0.0067." at 6845,5482.6 h60
  text "4.2 All plated holes are to be plated thru with .001\" min. thickness." at 6845,5355.2 h60
  text "4.3 All hole diameters are finished sizes." at 6845,5187.8 h60
  text "4.4 All holes are to be +/-.003\" from true position unless otherwise" at 6845,5060.4 h60
  text "specified for PTH, or +/-.002\" for NPTH." at 7070,4924 h60
  text "4.5 Use supplied NC drill file, see hole size table." at 6845,4765.6 h60
  text "4.6 Slots at top of fab that extend beyond board outline are intentional breakouts." at 6855,4605.6 h60
  text "4.7 Both 0.250\" plated holes shall have a tolerance of +.003/-.000" at 6855,4455.6 h60
  text "5. Front to back pattern shall register within .003\"." at 6680,4218.2 h60
  text "6. Layer to layer (pattern to pattern) shall register within .003\"." at 6680,4070.8 h60
  text "7. Soldermask: top side of board, Liquid Photo imageable," at 6680,3923.4 h60
  text "soldermask over bare copper (SMOBC), green." at 6930,3776 h60
  text "8. Warpage and twist to meet IPC class II." at 6680,3628.6 h60
  text "9. Silkscreen using white non-conductive epoxy or eqv." at 6680,3481.2 h60
  text "10. Finish:" at 6680,3313.8 h60
  text "10.1 Edge to be free of loose slivers and rough edges." at 6905,3186.39 h60
  text "10.2 Finished board shall not have nicks, scratches, voids," at 6905,3038.99 h60
  text "exposed copper, poor plating or misdrilled holes." at 7191,2891.59 h60
  text "11. All dimensions are in inches." at 6735,2754.4 h60
  text "12. Finished board thickness shall be 0.091+/-10%" at 6735,2607 h60
  text "Layer Stack Up Detail for: CELL16-PCB.PcbDoc" at 6810,2273 h52
  text "Layer" at 6810,2018.2 h52
  text "Name" at 6810,1914.2 h52
  text "Top Layer" at 6810,1583.75 h73
  text "3 oz. Cu" at 8015,1570 h73
  text "3 oz. Cu" at 8000,1235 h73
  text "Bottom Layer" at 6810,1200.75 h73

## Dimensions
0,0 to 4340,300 on Drill Drawing
0,0 to 250,6550 on Drill Drawing

## Text inside footprints (layer, text, board x,y; h text height)
P1: Top Overlay "1" at 1685,3340 h50 r180; Top Overlay "2" at 1700,3000 h50 r180
P6: Top Overlay "1" at 2070,6345 h50 r180; Top Overlay "2" at 2085,6005 h50 r180